# EAGLE board Design Eagle PCB (EAGLE 7.7.0)
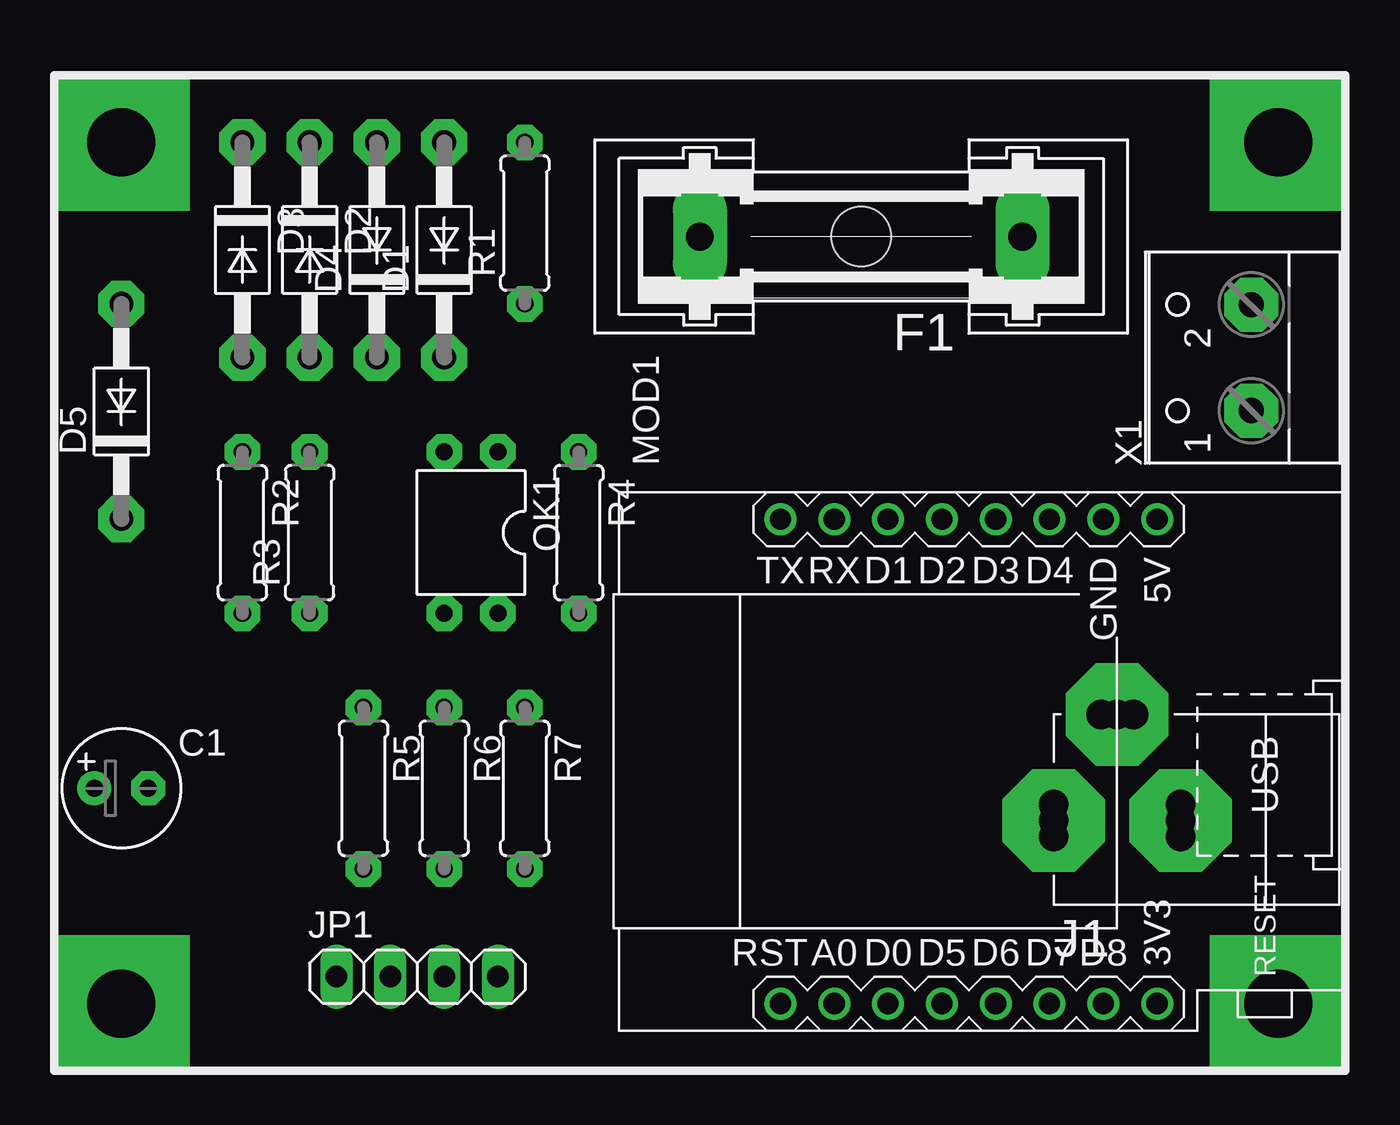
[diagram p0: board, top side]
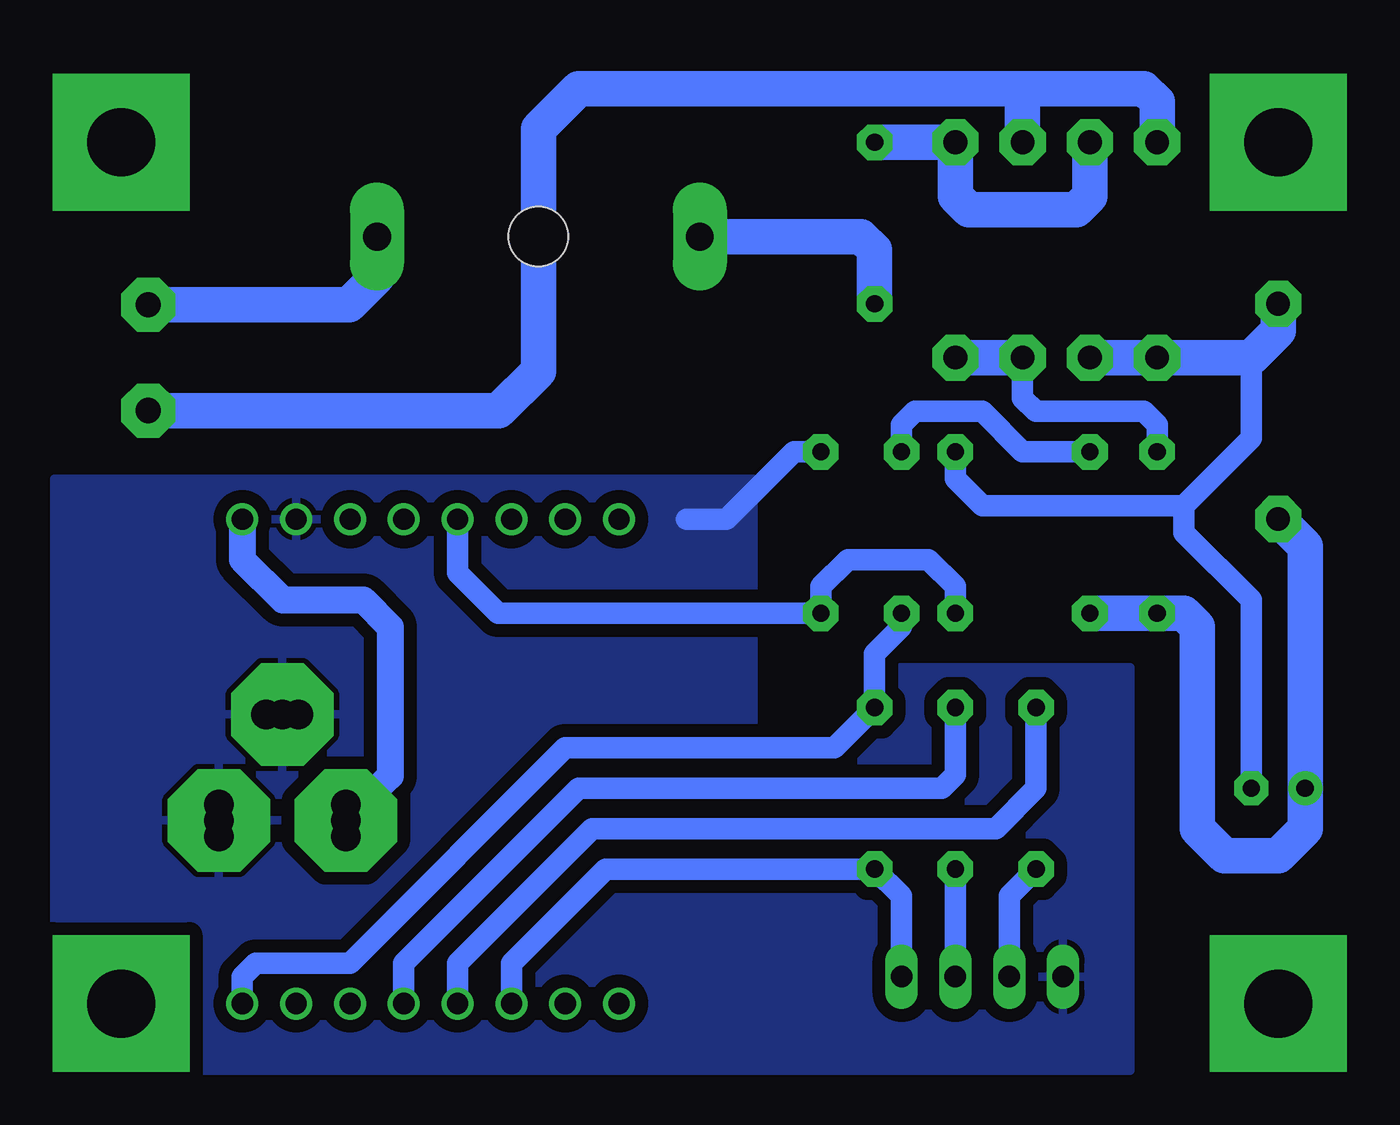
[diagram p1: board, bottom side, seen from below]

No outline drawn. Coordinates in mm, seen from the top.
Copper layers (1*16): Top 0.035mm / dielectric 1.5mm / Bottom 0.035mm
Design rules "default": minimum track width 10mil, minimum drill 24mil, track to track 8mil, track to pad 8mil, pad to pad 8mil, via to via 8mil, smd to smd 8mil, copper to edge 40mil, drill to drill 8mil, minimum pad ring 10mil, minimum via ring 8mil, stop-mask expansion 4mil, vias tented up to drill 0mil, thermal gap 10mil

## Footprints (pad centres in the part's own frame; a part is rotated, then mirrored left to right if it is on the bottom)
E2,5-6 = drill 0.813 pad 1.6: + -1.27,0 | drill 0.813 pad 1.6 octagon: - 1.27,0
D40-10 = drill 1.118 pad 2.184 octagon: A 5.08,0; C -5.08,0
GSH15 = drill 1.321 pad 2.54 long: 1 -7.62,0; 2 7.62,0 | hole 2.794: 0,0
JACK-PCB-ARDUINO = drill 1.4 pad 4.826 octagon: 1 -0.25,2.978; 2 4.754,-0.019; 3 -0.25,-3.016 | drill 1.4: 4 -1.012,2.978; 5 0.512,2.978; 6 4.754,0.743; 7 4.754,-0.781; 8 -1.012,-3.016; 9 0.512,-3.016
1X04 = drill 1.016 long: 1 -3.81,0; 2 -1.27,0; 3 1.27,0; 4 3.81,0
WEMOS-D1-MINI = drill 1: JP1.1 -11.43,9.525; JP1.2 -11.43,6.985; JP1.3 -11.43,4.445; JP1.4 -11.43,1.905; JP1.5 -11.43,-0.635; JP1.6 -11.43,-3.175; JP1.7 -11.43,-5.715; JP1.8 -11.43,-8.255; JP2.1 11.43,9.525; JP2.2 11.43,6.985; JP2.3 11.43,4.445; JP2.4 11.43,1.905; JP2.5 11.43,-0.635; JP2.6 11.43,-3.175; JP2.7 11.43,-5.715; JP2.8 11.43,-8.255
DIL04 = drill 0.813 pad 1.676 octagon: 1 -1.27,-3.81; 2 1.27,-3.81; 3 1.27,3.81; 4 -1.27,3.81
0207/7 = drill 0.813 pad 1.676 octagon: 1 -3.81,0; 2 3.81,0
KL2 = drill 1.194 pad 2.54 octagon: 1 -2.5,0; 2 2.5,0

## Placement (x,y rotation side)
C1  2.2uf/25V  [E2,5-6]  19.05,62.23 0 top
D1  1N4007  [D40-10]  34.29,87.63 90 top
D2  1N4007  [D40-10]  27.94,87.63 270 top
D3  1N4007  [D40-10]  24.77,87.63 270 top
D4  1N4007  [D40-10]  31.11,87.63 90 top
D5  ZENER 5V1  [D40-10]  19.05,80.01 90 top
F1  500mA  [GSH15]  53.98,88.27 180 top
J1  DC 5V  [JACK-PCB-ARDUINO]  66.04,60.96 90 top
JP1  LED BTN  [1X04]  33.02,53.34 0 top
MOD1  WEMOS-D1-MINI  [WEMOS-D1-MINI]  59.69,63.5 90 top
OK1  PC817  [DIL04]  35.56,74.3 180 top
R1  220K  [0207/7]  38.1,88.9 90 top
R2  100K  [0207/7]  24.77,74.3 270 top
R3  1K  [0207/7]  27.94,74.3 90 top
R4  4K7  [0207/7]  40.64,74.3 270 top
R5  330  [0207/7]  30.48,62.23 270 top
R6  330  [0207/7]  34.29,62.23 270 top
R7  10K  [0207/7]  38.1,62.23 270 top
X1  AC N-L  [KL2]  72.39,82.55 90 top

## Library data of the parts
C1 R1-R7 = FansElectronics-RCL
D1-D5 = FansElectronics-Diode
F1 = fuse; MPN: 64900001039; OC_FARNELL: 1271673; OC_NEWARK: 02P0318
J1 = FansElectronics-Con-Jack
JP1 = FansElectronics-Header
MOD1 = diy-modules
OK1 = optocoupler; MPN: PC817X4J000F; OC_FARNELL: 9707727; OC_NEWARK: 97K7059
X1 = FansElectronics-Con-Screw

## Nets
+3V3: MOD1.JP1.8 OK1.4 R7.1
+5V: J1.1 MOD1.JP2.8
BTN: JP1.4 MOD1.JP1.3 R7.2
GND: J1.2 J1.3 JP1.1 MOD1.JP2.7 R4.1
LEDG: MOD1.JP1.5 R6.1
LEDR: MOD1.JP1.4 R5.1
N$1: F1.1 X1.2
N$2: F1.2 R1.1
N$3: D1.A D2.C R1.2
N$4: D3.C D4.A X1.1
N$5: C1.- D2.A D3.A D5.A OK1.2
N$6: D1.C D4.C R2.1
N$7: OK1.1 R3.2
N$8: C1.+ D5.C R2.2 R3.1
N$9: JP1.3 R6.2
N$10: JP1.2 R5.2
SENSOR: MOD1.JP2.4 OK1.3 R4.2

## Tracks (layer width: path | path; a pad name or v marks a point on that pad's centre or on a via)
+3V3
  Bottom 1.016: MOD1.JP1.8 67.94,53.34 67.31,53.98 62.87,53.98 52.7,64.14 40.01,64.14 R7.1 38.1,68.58 36.83,69.85 OK1.4
+5V
  Bottom 1.27: MOD1.JP2.8 67.94,73.03 66.04,71.12 62.23,71.12 60.96,69.85 60.96,62.81 J1.1
BTN
  Bottom 1.016: JP1.4 36.83,57.15 R7.2 50.8,58.42 55.24,53.98 MOD1.JP1.3
GND
  Bottom 1.016: R4.1 41.91,78.11 45.09,74.93 46.99,74.93
  pour Bottom (isolate 0.61): 76.83,48.9 43.81,48.9 43.81,76.83 76.83,76.83
  pour Bottom (isolate 0.61): 45.09,48.9 26.04,48.9 26.04,67.94 45.09,67.94
LEDG
  Bottom 1.016: R6.1 34.29,62.87 34.92,62.23 52.07,62.23 60.33,53.98 MOD1.JP1.5
LEDR
  Bottom 1.016: MOD1.JP1.4 57.78,53.98 51.44,60.33 32.38,60.33 30.48,62.23 R5.1
N$1
  Bottom 1.676: X1.2 62.91,85.05 61.59,86.36 F1.1
N$2
  Bottom 1.676: F1.2 38.73,88.27 38.1,87.63 R1.1
N$3
  Bottom 1.676: D2.C 27.94,90.17 28.57,89.53 33.66,89.53 34.29,90.17 D1.A R1.2
N$4
  Bottom 1.676: D3.C 24.77,94.61 25.4,95.25 31.11,95.25 | 31.11,95.25 52.07,95.25 53.98,93.34 53.98,81.92 55.84,80.05 X1.1 | D4.A 31.11,95.25
N$5
  Bottom 1.016: D2.A 20.32,82.55 20.32,78.74 23.5,75.56 | 23.5,75.56 33.02,75.56 34.29,76.83 OK1.2 | C1.- 20.32,71.12 23.5,74.3 23.5,75.56
  Bottom 1.676: D2.A D3.A 20.32,82.55 19.05,83.82 D5.A
N$6
  Bottom 1.016: R2.1 24.77,79.38 25.4,80.01 30.48,80.01 31.11,80.64 31.11,81.92 31.75,82.55
  Bottom 1.676: D4.C 31.75,82.55 D1.C
N$7
  Bottom 1.016: R3.2 31.11,78.11 33.02,80.01 36.2,80.01 36.83,79.38 OK1.1
N$8
  Bottom 1.676: D5.C 17.78,73.66 C1.+ 17.78,60.33 19.05,59.05 21.59,59.05 22.86,60.33 22.86,69.85 23.5,70.48 R2.2 R3.1
N$9
  Bottom 1.016: JP1.3 R6.2
N$10
  Bottom 1.016: JP1.2 31.75,57.15 R5.2
N$11  (via drill 3.2 pad 6.45)
  other vias: 73.66,92.71
N$12  (via drill 3.2 pad 6.45)
  other vias: 19.05,92.71
N$13  (via drill 3.2 pad 6.45)
  other vias: 19.05,52.07
N$14  (via drill 3.2 pad 6.45)
  other vias: 73.66,52.07
SENSOR
  Bottom 1.016: OK1.3 34.29,71.75 35.56,73.03 39.37,73.03 40.64,71.75 R4.2 55.88,70.48 57.78,72.39 MOD1.JP2.4